# Altium PCB msr50.PcbDoc (part 3 of 8)
Units mil, origin at the board's own origin, x right, y up, seen from the top; angles counter-clockwise.
Board outline 3925 x 3925 mil, 2 copper layers (TopLayer, BottomLayer); 109 components, 122 nets, 846 pads, 52 vias.
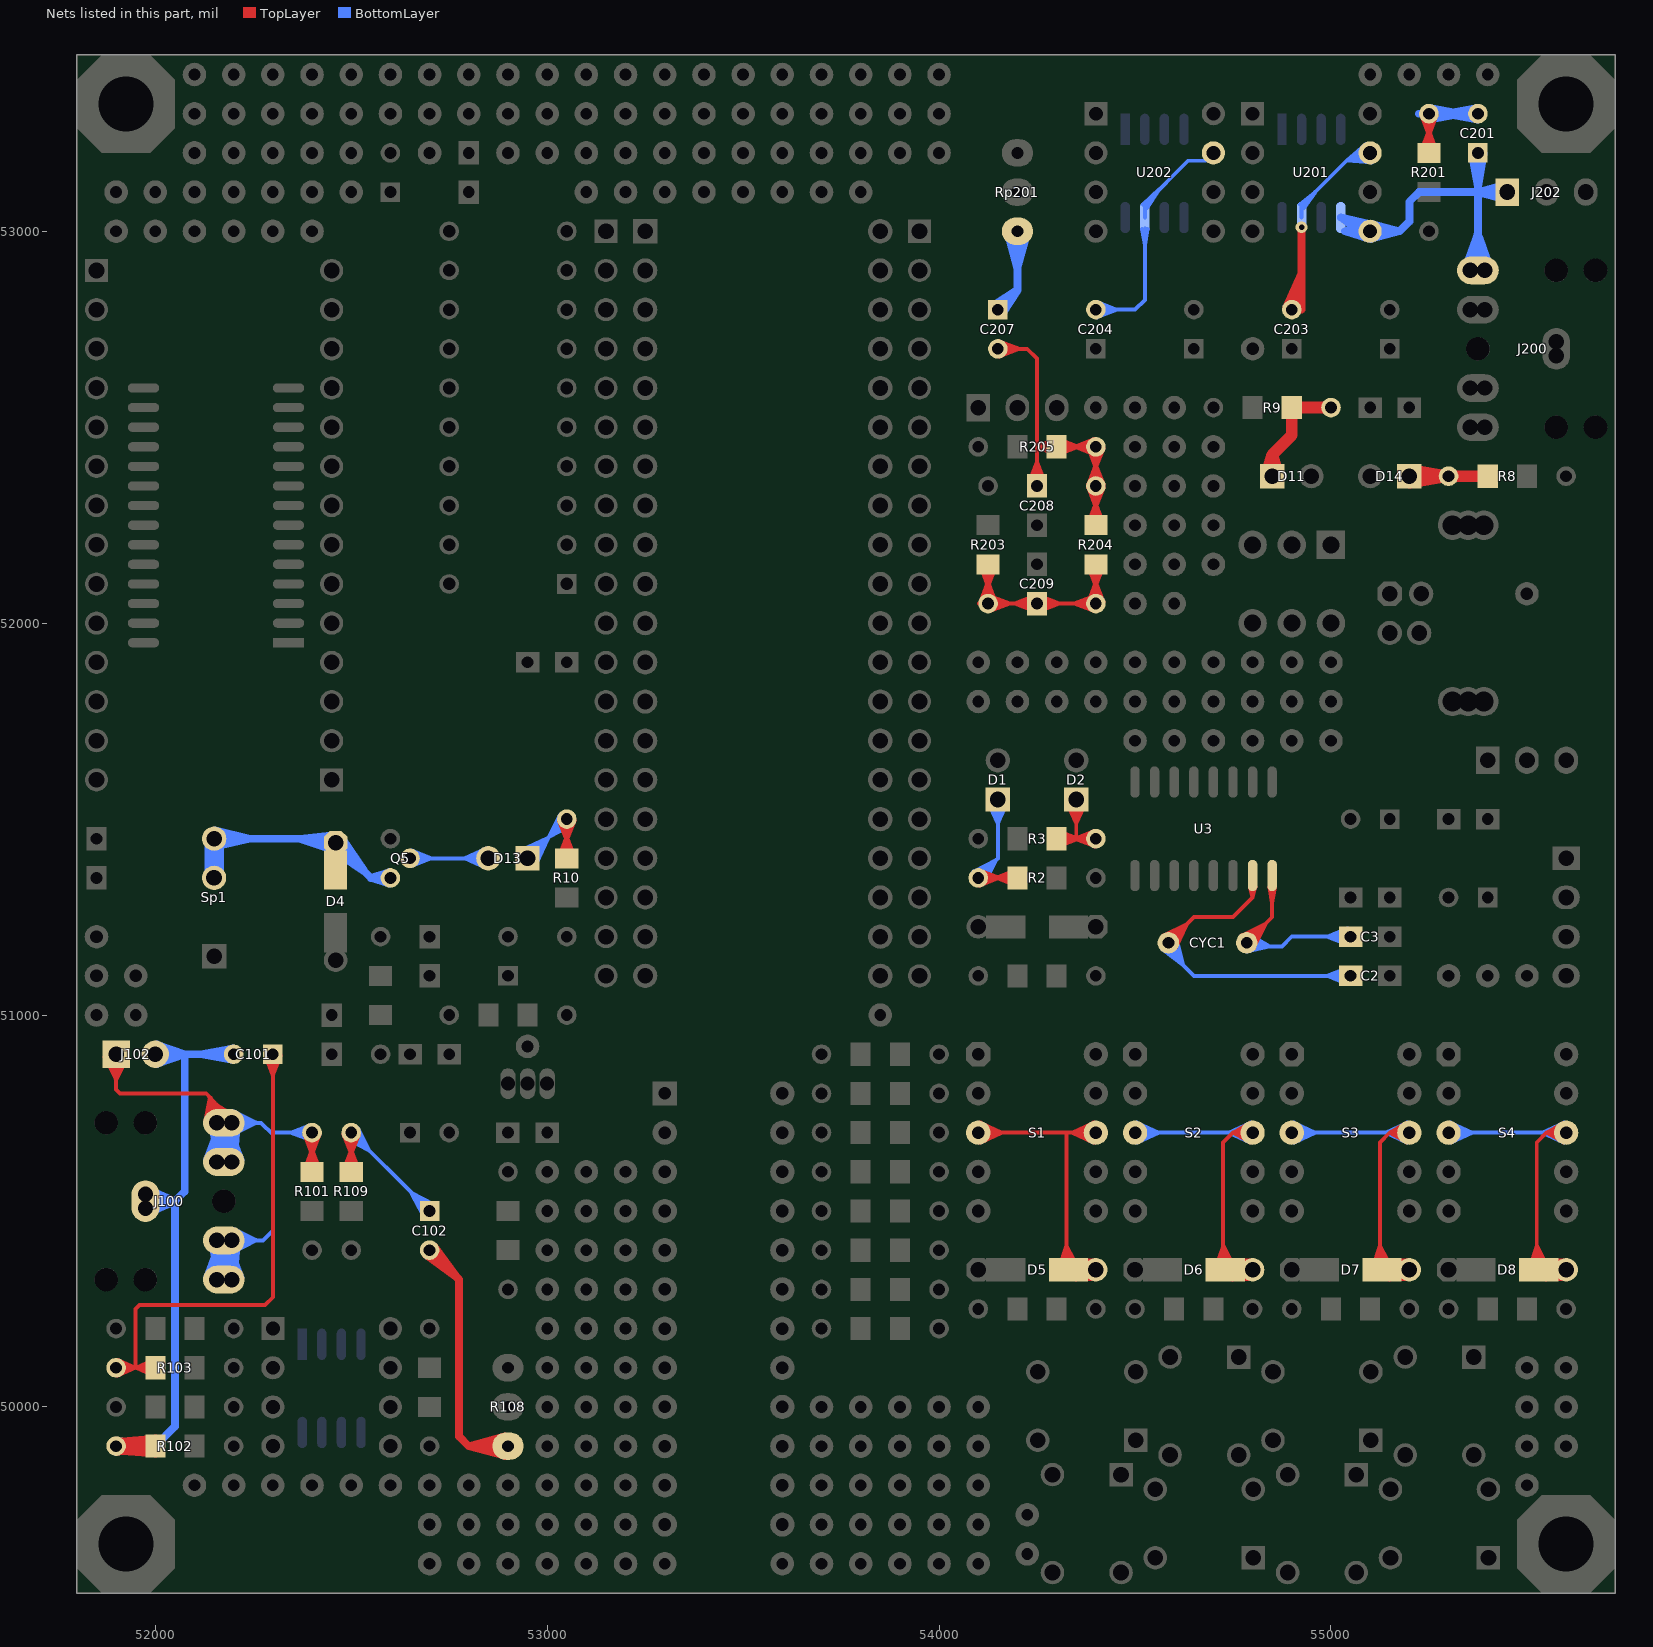
[diagram p3: the nets of this part, all layers, seen from the top]

## Via types
v1: diameter 30, hole 14, TopLayer to BottomLayer, 40 vias
v2: diameter 50, hole 28, TopLayer to BottomLayer, 12 vias

## Nets (pads, with @x,y where several pads share a name; then routed paths per layer and width w, separated by ;. In a path a pad name is that pad's centre, name@x,y a point inside that pad or via, vN(x,y) a via of type N, cw(c..) or ccw(c..) an arc to the next point about the centre after c; other vN are vias at no path point) (continued)
NetC2_1: C2.1 CYC1.2 U3.7 | length 1881
  TopLayer w10: CYC1.2@54571.95,51202.6 54633.56,51233.18 ; CYC1.2@54575.45,51175.07 54650.38,51250 54750,51250 54800,51300 ; CYC1.2@54577.08,51193.93 54633.56,51233.18 ; CYC1.2@54585.11,51184.35 54633.56,51233.18 ; CYC1.2@54594.75,51176.39 54633.56,51233.18 ; CYC1.2@54603.46,51171.33 54633.56,51233.18 ; U3.7@54793.05,51327.12 54800,51300 ; U3.7@54800,51328 54800,51300 ; U3.7@54800,51356 54800,51300 ; U3.7@54806.95,51327.12 54800,51300
  BottomLayer w10: CYC1.2@54568.69,51168.97 54622.08,51128.44 ; CYC1.2@54575.37,51176.52 54622.08,51128.44 ; CYC1.2@54575.45,51175.07 54650.52,51100 C2.1@55050,51100 ; CYC1.2@54585.11,51184.35 54622.08,51128.44 ; CYC1.2@54596.14,51190.24 54622.08,51128.44 ; CYC1.2@54605.7,51193.44 54622.08,51128.44 ; C2.1@55042.06,51079.37 54990,51100 ; C2.1@55042.06,51120.63 54990,51100 ; C2.1@55044.92,51089.05 54990,51100 ; C2.1@55044.92,51110.95 54990,51100 ; C2.1@55046,51100 54990,51100
NetC3_1: C3.1 CYC1.1 U3.8 | length 1540.5
  TopLayer w10: CYC1.1@54771.95,51202.6 54833.56,51233.18 ; CYC1.1@54775.45,51175.07 54850,51249.62 U3.8@54850,51356 ; CYC1.1@54777.08,51193.93 54833.56,51233.18 ; CYC1.1@54785.11,51184.35 54833.56,51233.18 ; CYC1.1@54794.75,51176.39 54833.56,51233.18 ; CYC1.1@54803.46,51171.33 54833.56,51233.18 ; U3.8@54843.02,51327.42 54850,51286 ; U3.8@54850,51328 54850,51286 ; U3.8@54856.98,51327.42 54850,51286
  BottomLayer w10: CYC1.1@54775.45,51175.07 54875.07,51175.07 54900,51200 C3.1@55050,51200 ; CYC1.1@54784.46,51171.87 54843.17,51175.07 ; CYC1.1@54785.11,51184.35 54843.17,51175.07 ; CYC1.1@54785.88,51161.87 54843.17,51175.07 ; CYC1.1@54788.39,51196.42 54843.17,51175.07 ; CYC1.1@54792.85,51205.48 54843.17,51175.07 ; C3.1@55042.06,51179.37 54990,51200 ; C3.1@55042.06,51220.63 54990,51200 ; C3.1@55044.92,51189.05 54990,51200 ; C3.1@55044.92,51210.95 54990,51200 ; C3.1@55046,51200 54990,51200
NetC101_1: C101.1 R103.2 R103.4 | length 1902.4
  TopLayer w10: R103.2@51900,50100 51950,50100 ; R103.2@51901,50090.05 51950,50100 ; R103.2@51901,50109.95 51950,50100 ; R103.2@51904,50080.4 51950,50100 ; R103.2@51904,50119.6 51950,50100 ; R103.4@51995.76,50079.85 51950,50100 ; R103.4@51995.76,50120.15 51950,50100 ; R103.4@51998.88,50089.47 51950,50100 ; R103.4@51998.88,50110.53 51950,50100 ; C101.1@52280.33,50896.36 52300,50845 ; C101.1@52290.04,50899.09 52300,50845 ; C101.1@52300,50900 52300,50280 52280,50260 51960,50260 51950,50250 51950,50100 ; C101.1@52309.96,50899.09 52300,50845 ; C101.1@52319.67,50896.36 52300,50845 ; 51950,50100 R103.4@52000,50100 51950,50100
NetC101_2: C101.2 J100.1 J100.1A J100.1B J102.2 R102.1 R102.3 | length 4388
  TopLayer w20: R102.1@51900,49900 R102.3@52000,49900 ; R102.1@51901.32,49885.06 51985,49900 R102.1@51901.32,49914.94 ; R102.3@51997.03,49888.63 R102.1@51914.83,49912.53 ; R102.3@51997.03,49911.37 R102.1@51914.83,49887.47 ; R102.3@51998.58,49884.47 51914.41,49900 R102.3@51998.58,49915.53 ; R102.3@52000,49896.06 R102.1@51914.83,49887.47 ; R102.3@52000,49903.94 R102.1@51914.83,49912.53 ; R102.3@52000.15,49880.47 R102.1@51914.83,49887.47 ; R102.3@52000.15,49919.53 R102.1@51914.83,49912.53
  BottomLayer w20: R102.1@51900,49900 52000,49900 52050,49950 52050,50525 ; R102.1@51901.32,49885.06 51985,49900 R102.1@51901.32,49914.94 ; J100.1@51975,50525 52050,50525 ; J100.1@51979.31,50499.94 52050,50525 ; J100.1@51979.31,50550.06 52050,50525 ; J102.2@52000,50900 52075,50900 ; J102.2@52004.17,50875.35 52075,50900 ; J102.2@52004.17,50924.65 52075,50900 ; C101.2@52198.68,50885.06 52115,50900 C101.2@52198.68,50914.94 ; C101.2@52200,50900 52075,50900 ; J100.1@51973.05,50529.23 52050,50525 ; J100.1@51973.05,50529.23 52050,50525 ; J100.1@51973.05,50529.23 52050,50525 ; J100.1@51973.05,50529.23 52050,50525 ; J100.1B@51975,50542.72 52050,50525 ; J100.1B@51975,50542.72 52050,50525 ; J100.1B@51975,50542.72 52050,50525 ; J100.1B@51975,50542.72 52050,50525 ; J100.1@51979.29,50555.65 52050,50525 ; J100.1@51979.29,50555.65 52050,50525 ; J100.1@51979.29,50555.65 52050,50525 ; J100.1@51979.29,50555.65 52050,50525 ; 52050,50525 J100.1A@51975,50507.28 52050,50525 ; 52050,50525 51979.29,50494.36 52050,50525 ; 52050,50525 51973.05,50520.77 52050,50525 ; 52050,50525 52075,50550 52075,50900
NetC102_1: C102.1 R109.2 R109.4 | length 1499
  TopLayer w10: R109.4@52479.77,50603.81 52500,50655.59 ; R109.2@52480.33,50696.36 52500,50645 ; R109.4@52489.46,50601.01 52500,50655.59 ; R109.2@52490.04,50699.09 52500,50645 ; R109.4@52500,50600 52500,50655.59 ; R109.4@52500,50625 R109.2@52500,50700 52500,50645 ; R109.2@52509.96,50699.09 52500,50645 ; R109.4@52510.54,50601.01 52500,50655.59 ; R109.2@52519.67,50696.36 52500,50645 ; R109.4@52520.23,50603.81 52500,50655.59
  BottomLayer w10: R109.2@52488.19,50683.86 52546.21,50653.79 ; R109.2@52493.49,50692.41 52546.21,50653.79 ; R109.2@52500,50700 52675,50525 C102.1@52700,50500 52653.79,50546.21 ; R109.2@52507.59,50706.51 52546.21,50653.79 ; R109.2@52516.14,50711.81 52546.21,50653.79 ; C102.1@52683.86,50488.19 52653.79,50546.21 ; C102.1@52692.41,50493.49 52653.79,50546.21 ; C102.1@52706.51,50507.59 52653.79,50546.21 ; C102.1@52711.81,50516.14 52653.79,50546.21
NetC102_2: C102.2 R108.1 | length 1497.1
  TopLayer w20: C102.2@52690.26,50388.59 52767.43,50332.57 C102.2@52711.41,50409.74 ; C102.2@52700,50400 52775,50325 52775,50040 52775,50010 52775,49925 52800,49900 ; R108.1@52900,49900 52800,49900 ; 52800,49900 R108.1@52895,49900 ; 52800,49900 52891.71,49924.78 52800,49900 ; 52800,49900 52891.71,49875.22 52800,49900 ; 52800,49900 R108.1@52895,49900 ; 52800,49900 R108.1@52895,49900
NetC201_1: C201.1 R201.2 R201.4 | length 1117.4
  TopLayer w10: R201.4@55229.77,53203.81 55250,53255.59 ; R201.2@55230.33,53296.36 55250,53245 ; R201.4@55239.46,53201.01 55250,53255.59 ; R201.2@55240.04,53299.09 55250,53245 ; R201.4@55250,53200 R201.2@55250,53300 ; R201.2@55259.96,53299.09 55250,53245 ; R201.4@55260.54,53201.01 55250,53255.59 ; R201.2@55269.67,53296.36 55250,53245 ; R201.4@55270.23,53203.81 55250,53255.59
  BottomLayer w20: R201.2@55225,53300 C201.1@55375,53300 ; R201.2@55250,53300 55335,53300 ; R201.2@55251.32,53285.06 55335,53300 ; R201.2@55251.32,53314.94 55335,53300 ; C201.1@55373.68,53285.06 55290,53300 C201.1@55373.68,53314.94
NetC201_2: C201.2 J200.5 J200.5A J200.5B J202.1 U201.5 U201.15 | length 4376.9
  BottomLayer w20: U201.5@55100.69,52999.31 U201.5@55100,53000 ; U201.5@55102.54,52980.64 55175,53000 ; U201.5@55102.54,53019.36 55175,53000 ; J200.5@55341.9,52903.74 55371.62,52983.09 ; J200.5@55341.94,52903.88 55375,52991.33 ; J200.5@55341.98,52904.01 55375,52988.01 ; J200.5@55349.79,52903.39 55375,52995.43 ; C201.2@55360.06,53198.68 55375,53115 ; J200.5@55368.47,52897.99 55375,52988.01 ; J200.5@55368.48,52898.06 55375,52991.33 ; J200.5@55368.53,52898.41 55371.62,52983.09 ; J200.5@55375,52900 55375,52995.43 ; J200.5@55375,52907.28 55375,53100 ; C201.2@55375,53175 55375,53100 ; C201.2@55375,53200 55375,53115 ; J200.5@55379.15,52898.75 55378.16,52983.89 ; J200.5@55379.2,52898.32 55375,52987.12 ; J200.5@55379.29,52897.71 55371.62,52983.09 ; C201.2@55389.94,53198.68 55375,53115 ; J200.5@55400.21,52903.39 55375,52995.43 ; J200.5@55405.61,52904.39 55371.62,52983.09 ; J200.5@55405.82,52903.73 55375,52987.12 ; J200.5@55405.85,52903.62 55375,52989.89 ; J200.5@55405.85,52903.63 55374.91,52990.08 ; J200.5@55405.83,52903.69 55375,52988.01 ; J200.5@55405.91,52903.39 55378.16,52983.89 ; J202.1@55447.33,53080.18 55375,53100 ; J202.1@55447.33,53119.82 55375,53100 ; J202.1@55450,53100 55375,53100 ; U201.15@55025,53035 55097.07,53019.31 55035,53000 ; U201.15@55025,53035 55097.07,52980.69 55035,53000 ; U201.15@55025,53035 U201.5@55100,53000 ; 55035,53000 U201.5@55100,53000 ; U201.5@55100,53000 55175,53000 ; 55175,53000 55200,53025 55200,53075 55225,53100 55375,53100 ; J200.5A@55355,52900 55371.62,52983.09 ; J200.5A@55355,52900 55375,52988.01 ; J200.5A@55355,52900 55375,52991.33 ; 55371.62,52983.09 J200.5B@55392.72,52900 ; 55374.91,52990.08 J200.5B@55392.72,52900 ; 55374.91,52990.08 J200.5@55379.19,52898.36 ; 55375,52987.12 J200.5B@55392.72,52900 ; 55375,52988.01 J200.5B@55392.72,52900 ; 55375,52988.01 J200.5@55379.2,52898.33 ; 55375,52989.89 J200.5B@55392.72,52900 ; 55375,52989.89 J200.5@55379.19,52898.37 ; 55378.16,52983.89 J200.5B@55392.72,52900
NetC203_2: C203.2 U201.7 U201.17 | length 1228.6
  TopLayer w20: C203.2@54885.86,52804.99 54925,52893.32 ; C203.2@54900,52800 54925,52893.32 ; C203.2@54914.75,52797.25 54925,52893.32 ; 54925,52800 v1(54925,53010)
  BottomLayer w10: U201.17@54920.26,53068.15 54959.72,53099.72 ; U201.17@54925,53035 54925,53065 55040,53180 ; U201.17@54925,53063 54959.72,53099.72 ; U201.17@54930.41,53058.55 54959.72,53099.72 ; U201.7@55087.88,53221.32 55040,53180 ; U201.7@55093.85,53213.16 55040,53180 ; U201.7@55102.98,53185.78 55040,53180 ; U201.7@55103.1,53175.67 55040,53180 ; 55040,53180 U201.7@55100,53200 55080,53180 55040,53180
NetC204_2: C204.2 U202.7 U202.17 | length 1098.6
  BottomLayer w10: C204.2@54400,52800 54500,52800 54525,52825 U202.17@54525,53005 ; C204.2@54400.91,52790.04 54455,52800 ; C204.2@54400.91,52809.96 54455,52800 ; C204.2@54403.64,52780.33 54455,52800 ; C204.2@54403.64,52819.67 54455,52800 ; U202.17@54518.02,53006.42 54525,52965 ; U202.17@54519.93,53067.82 54562.21,53107.21 ; U202.17@54525,53007 54525,52965 ; U202.17@54525,53035 54525,53070 54635,53180 54680,53180 U202.7@54700,53200 ; U202.17@54525,53063 54562.21,53107.21 ; U202.17@54530.62,53058.82 54562.21,53107.21 ; U202.17@54531.98,53006.42 54525,52965
NetC207_1: C207.1 Rp201.3 | length 552.1
  BottomLayer w20: C207.1@54140.58,52811.67 54200,52850 ; C207.1@54150,52800 54200,52850 ; C207.1@54161.67,52790.58 54200,52850 ; Rp201.3@54175.22,52996.71 54200,52905 Rp201.3@54224.78,52996.71 ; Rp201.3@54200,53000 54200,52850
NetC207_2: C207.2 C208.1 R204.2 R204.4 R205.1 R205.3 | length 2810.5
  TopLayer w10: C207.2@54150,52700 54225,52700 54250,52675 54250,52450 ; C207.2@54150.91,52690.04 54205,52700 ; C207.2@54150.91,52709.96 54205,52700 ; C207.2@54153.64,52680.33 54205,52700 ; C207.2@54153.64,52719.67 54205,52700 ; C208.1@54229.37,52357.94 54250,52410 ; C208.1@54239.05,52355.08 54250,52410 ; C208.1@54250,52350 54250,52450 ; C208.1@54250,52354 54250,52410 ; C208.1@54260.95,52355.08 54250,52410 ; C208.1@54270.63,52357.94 54250,52410 ; R205.3@54295.76,52429.85 54250,52450 ; R205.3@54295.76,52470.15 54250,52450 ; R205.3@54298.88,52439.47 54250,52450 ; R205.3@54298.88,52460.53 54250,52450 ; R205.3@54301.01,52439.46 54355.59,52450 ; R205.3@54301.01,52460.54 54355.59,52450 ; R205.3@54303.81,52429.77 54355.59,52450 ; R205.3@54303.81,52470.23 54355.59,52450 ; R204.4@54379.77,52253.81 54400,52305.59 ; R204.2@54380.33,52346.36 54400,52295 ; R204.2@54380.33,52353.64 54400,52405 ; R205.1@54380.33,52446.36 54400,52395 ; R204.4@54389.46,52251.01 54400,52305.59 ; R204.2@54390.04,52349.09 54400,52295 ; R204.2@54390.04,52350.91 54400,52405 ; R205.1@54390.04,52449.09 54400,52395 ; R205.1@54396.36,52430.33 54345,52450 ; R205.1@54396.36,52469.67 54345,52450 ; R205.1@54399.09,52440.04 54345,52450 ; R205.1@54399.09,52459.96 54345,52450 ; R204.4@54400,52250 R204.2@54400,52350 R205.1@54400,52450 54250,52450 ; R204.2@54409.96,52349.09 54400,52295 ; R204.2@54409.96,52350.91 54400,52405 ; R205.1@54409.96,52449.09 54400,52395 ; R204.4@54410.54,52251.01 54400,52305.59 ; R204.2@54419.67,52346.36 54400,52295 ; R204.2@54419.67,52353.64 54400,52405 ; R205.1@54419.67,52446.36 54400,52395 ; R204.4@54420.23,52253.81 54400,52305.59
  BottomLayer w10: R204.2@54400,52350 R204.2@54400.46,52350
NetC209_1: C209.1 R203.2 R203.4 R204.1 R204.3 | length 2271.1
  TopLayer w10: R203.2@54101.67,52050 R203.2@54125,52050 ; R203.4@54104.77,52146.19 54125,52094.41 ; R203.2@54105.33,52053.64 54125,52105 ; R203.4@54114.46,52148.99 54125,52094.41 ; R203.2@54115.04,52050.91 54125,52105 ; R203.4@54125,52150 R203.2@54125,52050 ; R203.2@54125.91,52040.04 54180,52050 ; R203.2@54125.91,52059.96 54180,52050 ; R203.2@54128.64,52030.33 54180,52050 ; R203.2@54128.64,52069.67 54180,52050 ; R203.2@54134.96,52050.91 54125,52105 ; R203.4@54135.54,52148.99 54125,52094.41 ; R203.2@54144.67,52053.64 54125,52105 ; R203.4@54145.23,52146.19 54125,52094.41 ; C209.1@54246.06,52029.37 54194,52050 ; C209.1@54246.06,52070.63 54194,52050 ; C209.1@54248.92,52039.05 54194,52050 ; C209.1@54248.92,52060.95 54194,52050 ; C209.1@54251.08,52039.05 54306,52050 ; C209.1@54251.08,52060.95 54306,52050 ; C209.1@54253.94,52029.37 54306,52050 ; C209.1@54253.94,52070.63 54306,52050 ; R204.3@54379.77,52146.19 54400,52094.41 ; R204.1@54380.33,52053.64 54400,52105 ; R204.3@54389.46,52148.99 54400,52094.41 ; R204.1@54390.04,52050.91 54400,52105 ; R204.1@54396.36,52030.33 54345,52050 ; R204.1@54396.36,52069.67 54345,52050 ; R204.1@54399.09,52040.04 54345,52050 ; R204.1@54399.09,52059.96 54345,52050 ; R204.3@54400,52150 R204.1@54400,52050 C209.1@54250,52050 R203.2@54125,52050 ; R204.1@54409.96,52050.91 54400,52105 ; R204.3@54410.54,52148.99 54400,52094.41 ; R204.1@54419.67,52053.64 54400,52105 ; R204.3@54420.23,52146.19 54400,52094.41
NetD1_2: D1.2 R2.2 R2.4 | length 1390.5
  TopLayer w10: R2.2@54100,51350 R2.4@54200,51350 ; R2.2@54100.91,51340.04 54155,51350 ; R2.2@54100.91,51359.96 54155,51350 ; R2.2@54103.64,51330.33 54155,51350 ; R2.2@54103.64,51369.67 54155,51350 ; R2.4@54196.19,51329.77 54144.41,51350 ; R2.4@54196.19,51370.23 54144.41,51350 ; R2.4@54198.99,51339.46 54144.41,51350 ; R2.4@54198.99,51360.54 54144.41,51350
  BottomLayer w10: R2.2@54088.19,51366.14 54146.21,51396.21 ; R2.2@54093.49,51357.59 54146.21,51396.21 ; R2.2@54100,51350 54150,51400 D1.2@54150,51550 ; R2.2@54107.59,51343.49 54146.21,51396.21 ; R2.2@54116.14,51338.19 54146.21,51396.21 ; D1.2@54124.6,51544.46 54150,51489 ; D1.2@54134.14,51547.9 54150,51489 ; D1.2@54144.01,51549.7 54150,51489 ; D1.2@54155.99,51549.7 54150,51489 ; D1.2@54165.86,51547.9 54150,51489 ; D1.2@54175.4,51544.46 54150,51489
NetD2_2: D2.2 R3.2 R3.4 | length 1008.4
  TopLayer w10: R3.4@54300,51450 R3.2@54400,51450 ; R3.4@54301.01,51439.46 54355.59,51450 ; R3.4@54301.01,51460.54 54355.59,51450 ; R3.4@54303.81,51429.77 54355.59,51450 ; R3.4@54303.81,51470.23 54355.59,51450 ; D2.2@54324.6,51544.46 54350,51489 ; D2.2@54334.14,51547.9 54350,51489 ; D2.2@54344.01,51549.7 54350,51489 ; 54350,51450 D2.2@54350,51550 ; D2.2@54355.99,51549.7 54350,51489 ; D2.2@54365.86,51547.9 54350,51489 ; D2.2@54375.4,51544.46 54350,51489 ; R3.2@54396.36,51430.33 54345,51450 ; R3.2@54396.36,51469.67 54345,51450 ; R3.2@54399.09,51440.04 54345,51450 ; R3.2@54399.09,51459.96 54345,51450
NetD4_1: D4.1 D4.3 Q5.3 Sp1.2 Sp1.3 | length 1648.7
  BottomLayer w20: Sp1.3@52150.33,51450.09 52241.33,51450 ; Sp1.3@52150.42,51450 52450,51450 52550,51350 ; Sp1.3@52152.73,51429.22 52241.33,51450 ; Sp1.3@52152.77,51470.94 52241.33,51450 ; D4.1@52447.39,51424.46 52532.51,51367.49 ; D4.1@52455.77,51420.39 52368.1,51450 ; D4.1@52460.1,51459.92 52368.1,51450 ; D4.1@52475.54,51452.61 52532.51,51367.49 ; Q5.3@52597.75,51335.17 52550,51350 ; Q5.3@52597.75,51364.83 52550,51350 ; Q5.3@52600,51350 52550,51350 ; 52368.1,51450 D4.1@52460.08,51439.92 52532.51,51367.49
  BottomLayer w50: Sp1.3@52150,51449.76 Sp1.2@52150,51350 Sp1.3@52150.33,51450.09
NetD5_2: D5.2 D5.4 S1.3 S1.8 | length 3189.6
  TopLayer w10: S1.3@54100,50700 54325,50700 ; S1.3@54100.3,50694.01 54161,50700 ; S1.3@54100.3,50705.99 54161,50700 ; S1.3@54102.1,50684.14 54161,50700 ; S1.3@54102.1,50715.86 54161,50700 ; S1.3@54105.54,50674.6 54161,50700 ; S1.3@54105.54,50725.4 54161,50700 ; D5.4@54305.65,50352.91 54325,50411.44 ; D5.4@54315.48,50350.54 54325,50411.44 ; D5.4@54330,50350 54325,50411.44 ; D5.4@54344.17,50326.3 D5.2@54393.75,50325.79 ; D5.4@54344.17,50373.7 D5.2@54393.75,50374.21 ; D5.4@54344.24,50352.88 54325,50411.44 ; D5.4@54345.31,50336.42 D5.2@54393.75,50325.79 ; D5.4@54345.31,50363.58 D5.2@54393.75,50374.21 ; D5.4@54348.2,50335.65 D5.2@54397.75,50335.17 ; D5.4@54348.2,50364.35 D5.2@54397.75,50364.83 ; D5.4@54349.15,50325.51 D5.2@54397.75,50335.17 ; D5.4@54349.15,50374.49 D5.2@54397.75,50364.83 ; D5.4@54352.6,50335.63 D5.2@54400,50350 ; D5.4@54352.6,50364.37 D5.2@54400,50350 ; D5.4@54353.56,50356.81 54325,50411.44 ; D5.4@54356.55,50326.24 D5.2@54400,50350 ; D5.4@54356.55,50373.76 D5.2@54400,50350 ; D5.4@54356.81,50336.93 D5.2@54397.75,50364.83 ; D5.4@54356.81,50363.07 D5.2@54397.75,50335.17 ; D5.4@54359.34,50338.5 D5.2@54393.75,50374.21 ; D5.4@54359.34,50361.5 D5.2@54393.75,50325.79 ; D5.4@54363.38,50329.14 D5.2@54397.75,50364.83 ; D5.4@54363.38,50370.86 D5.2@54397.75,50335.17 ; D5.4@54367.37,50332.22 D5.2@54393.75,50374.21 ; D5.4@54367.37,50367.78 D5.2@54393.75,50325.79 ; S1.8@54394.46,50674.6 54339,50700 ; S1.8@54394.46,50725.4 54339,50700 ; S1.8@54397.9,50684.14 54339,50700 ; S1.8@54397.9,50715.86 54339,50700 ; S1.8@54399.7,50694.01 54339,50700 ; S1.8@54399.7,50705.99 54339,50700 ; S1.8@54400,50700 54325,50700 ; 54325,50700 54325,50375 D5.4@54350,50350 ; D5.4@54350,50350 D5.2@54397.75,50364.83 ; D5.4@54350,50350 D5.2@54397.75,50335.17 ; D5.4@54350,50350 D5.2@54393.75,50374.21 ; D5.4@54350,50350 D5.2@54393.75,50325.79 ; D5.4@54350,50350 D5.2@54400,50350 ; D5.4@54350.47,50350 D5.2@54397.75,50364.83 ; D5.4@54350.47,50350 D5.2@54397.75,50335.17 ; D5.4@54350.47,50350 D5.2@54400,50350 ; D5.4@54350.47,50350 D5.2@54393.75,50374.21 ; D5.4@54350.47,50350 D5.2@54393.75,50325.79
NetD6_2: D6.2 D6.4 S2.3 S2.8 | length 3549.8
  TopLayer w10: D6.4@54705.65,50352.92 54725,50411.42 ; D6.4@54715.48,50350.54 54725,50411.42 ; D6.4@54730,50350 54725,50411.42 ; D6.4@54744.17,50326.3 D6.2@54793.75,50325.79 ; D6.4@54744.17,50373.7 D6.2@54793.75,50374.21 ; D6.4@54744.24,50352.88 54725,50411.42 ; D6.4@54745.31,50336.42 D6.2@54793.75,50325.79 ; D6.4@54745.31,50363.58 D6.2@54793.75,50374.21 ; D6.4@54748.2,50335.65 D6.2@54797.75,50335.17 ; D6.4@54748.2,50364.35 D6.2@54797.75,50364.83 ; D6.4@54749.15,50325.51 D6.2@54797.75,50335.17 ; D6.4@54749.15,50374.49 D6.2@54797.75,50364.83 ; D6.4@54752.6,50335.63 D6.2@54800,50350 ; D6.4@54752.6,50364.37 D6.2@54800,50350 ; D6.4@54753.56,50356.82 54725,50411.42 ; D6.4@54756.55,50326.24 D6.2@54800,50350 ; D6.4@54756.55,50373.76 D6.2@54800,50350 ; D6.4@54756.81,50336.93 D6.2@54797.75,50364.83 ; D6.4@54756.81,50363.07 D6.2@54797.75,50335.17 ; D6.4@54759.34,50338.5 D6.2@54793.75,50374.21 ; D6.4@54759.34,50361.5 D6.2@54793.75,50325.79 ; D6.4@54763.38,50329.14 D6.2@54797.75,50364.83 ; D6.4@54763.38,50370.86 D6.2@54797.75,50335.17 ; D6.4@54767.37,50332.22 D6.2@54793.75,50374.21 ; D6.4@54767.37,50367.78 D6.2@54793.75,50325.79 ; S2.8@54793.24,50674.89 54750,50700 ; S2.8@54793.24,50725.11 54750,50700 ; S2.8@54797.44,50684.21 54750,50700 ; S2.8@54797.44,50715.79 54750,50700 ; S2.8@54799.64,50694.01 54750,50700 ; S2.8@54799.64,50705.99 54750,50700 ; S2.8@54800,50700 54750,50700 ; D6.4@54750,50350 D6.2@54797.75,50364.83 ; D6.4@54750,50350 D6.2@54797.75,50335.17 ; D6.4@54750,50350 D6.2@54793.75,50374.21 ; D6.4@54750,50350 D6.2@54793.75,50325.79 ; D6.4@54750,50350 54725,50375 54725,50675 54750,50700 ; D6.4@54750,50350 D6.2@54800,50350 ; D6.4@54750.47,50350 D6.2@54797.75,50364.83 ; D6.4@54750.47,50350 D6.2@54797.75,50335.17 ; D6.4@54750.47,50350 D6.2@54800,50350 ; D6.4@54750.47,50350 D6.2@54793.75,50374.21 ; D6.4@54750.47,50350 D6.2@54793.75,50325.79
  BottomLayer w10: S2.3@54500,50700 S2.8@54800,50700 ; S2.3@54500.3,50694.01 54561,50700 ; S2.3@54500.3,50705.99 54561,50700 ; S2.3@54502.1,50684.14 54561,50700 ; S2.3@54502.1,50715.86 54561,50700 ; S2.3@54505.54,50674.6 54561,50700 ; S2.3@54505.54,50725.4 54561,50700 ; S2.8@54794.46,50674.6 54739,50700 ; S2.8@54794.46,50725.4 54739,50700 ; S2.8@54797.9,50684.14 54739,50700 ; S2.8@54797.9,50715.86 54739,50700 ; S2.8@54799.7,50694.01 54739,50700 ; S2.8@54799.7,50705.99 54739,50700
NetD7_2: D7.2 D7.4 S3.3 S3.8 | length 4581.8
  TopLayer w10: D7.4@55105.65,50352.92 55125,50411.42 ; D7.4@55115.48,50350.54 55125,50411.42 ; D7.4@55130,50350 55125,50411.42 ; D7.4@55144.17,50326.3 D7.2@55193.75,50325.79 ; D7.4@55144.17,50373.7 D7.2@55193.75,50374.21 ; D7.4@55144.24,50352.88 55125,50411.42 ; D7.4@55145.31,50336.42 D7.2@55193.75,50325.79 ; D7.4@55145.31,50363.58 D7.2@55193.75,50374.21 ; D7.4@55148.2,50335.65 D7.2@55197.75,50335.17 ; D7.4@55148.2,50364.35 D7.2@55197.75,50364.83 ; D7.4@55149.15,50325.51 D7.2@55197.75,50335.17 ; D7.4@55149.15,50374.49 D7.2@55197.75,50364.83 ; D7.4@55152.6,50335.63 D7.2@55200,50350 ; D7.4@55152.6,50364.37 D7.2@55200,50350 ; D7.4@55153.56,50356.82 55125,50411.42 ; D7.4@55156.55,50326.24 D7.2@55200,50350 ; D7.4@55156.55,50373.76 D7.2@55200,50350 ; D7.4@55156.81,50336.93 D7.2@55197.75,50364.83 ; D7.4@55156.81,50363.07 D7.2@55197.75,50335.17 ; D7.4@55159.34,50338.5 D7.2@55193.75,50374.21 ; D7.4@55159.34,50361.5 D7.2@55193.75,50325.79 ; D7.4@55163.38,50329.14 D7.2@55197.75,50364.83 ; D7.4@55163.38,50370.86 D7.2@55197.75,50335.17 ; D7.4@55167.37,50332.22 D7.2@55193.75,50374.21 ; D7.4@55167.37,50367.78 D7.2@55193.75,50325.79 ; S3.8@55193.24,50674.89 55150,50700 ; S3.8@55193.24,50725.11 55150,50700 ; S3.8@55197.44,50684.21 55150,50700 ; S3.8@55197.44,50715.79 55150,50700 ; S3.8@55199.64,50694.01 55150,50700 ; S3.8@55199.64,50705.99 55150,50700 ; S3.8@55200,50700 55150,50700 ; D7.4@55150,50350 D7.2@55197.75,50364.83 ; D7.4@55150,50350 D7.2@55197.75,50335.17 ; D7.4@55150,50350 D7.2@55193.75,50374.21 ; D7.4@55150,50350 D7.2@55193.75,50325.79 ; D7.4@55150,50350 D7.2@55200,50350 ; D7.4@55150,50350 55125,50375 55125,50675 55150,50700 ; D7.4@55150.47,50350 D7.2@55197.75,50364.83 ; D7.4@55150.47,50350 D7.2@55197.75,50335.17 ; D7.4@55150.47,50350 D7.2@55200,50350 ; D7.4@55150.47,50350 D7.2@55193.75,50374.21 ; D7.4@55150.47,50350 D7.2@55193.75,50325.79
  BottomLayer w10: 54961,50700 54900.3,50694.01 54961,50700 ; 54961,50700 54900.3,50705.99 54961,50700 ; 54961,50700 54902.1,50684.14 54961,50700 ; 54961,50700 54902.1,50715.86 54961,50700 ; 54961,50700 54905.54,50674.6 54961,50700 ; 54961,50700 54905.54,50725.4 54961,50700 ; 55139,50700 55199.7,50705.99 55139,50700 ; 55139,50700 55199.7,50694.01 55139,50700 ; 55139,50700 55197.9,50715.86 55139,50700 ; 55139,50700 55197.9,50684.14 55139,50700 ; 55139,50700 55194.46,50725.4 55139,50700 ; 55139,50700 55194.46,50674.6 55139,50700 ; S3.3@54900,50700 S3.8@55200,50700 S3.3@54900,50700
NetD8_2: D8.2 D8.4 S4.3 S4.8 | length 3549.8
  TopLayer w10: D8.4@55505.65,50352.92 55525,50411.42 ; D8.4@55515.48,50350.54 55525,50411.42 ; D8.4@55530,50350 55525,50411.42 ; D8.4@55544.17,50326.3 D8.2@55593.75,50325.79 ; D8.4@55544.17,50373.7 D8.2@55593.75,50374.21 ; D8.4@55544.24,50352.88 55525,50411.42 ; D8.4@55545.31,50336.42 D8.2@55593.75,50325.79 ; D8.4@55545.31,50363.58 D8.2@55593.75,50374.21 ; D8.4@55548.2,50335.65 D8.2@55597.75,50335.17 ; D8.4@55548.2,50364.35 D8.2@55597.75,50364.83 ; D8.4@55549.15,50325.51 D8.2@55597.75,50335.17 ; D8.4@55549.15,50374.49 D8.2@55597.75,50364.83 ; D8.4@55552.6,50335.63 D8.2@55600,50350 ; D8.4@55552.6,50364.37 D8.2@55600,50350 ; D8.4@55553.56,50356.82 55525,50411.42 ; D8.4@55556.55,50326.24 D8.2@55600,50350 ; D8.4@55556.55,50373.76 D8.2@55600,50350 ; D8.4@55556.81,50336.93 D8.2@55597.75,50364.83 ; D8.4@55556.81,50363.07 D8.2@55597.75,50335.17 ; D8.4@55559.34,50338.5 D8.2@55593.75,50374.21 ; D8.4@55559.34,50361.5 D8.2@55593.75,50325.79 ; D8.4@55563.38,50329.14 D8.2@55597.75,50364.83 ; D8.4@55563.38,50370.86 D8.2@55597.75,50335.17 ; D8.4@55567.37,50332.22 D8.2@55593.75,50374.21 ; D8.4@55567.37,50367.78 D8.2@55593.75,50325.79 ; S4.8@55593.24,50674.89 55550,50700 ; S4.8@55593.24,50725.11 55550,50700 ; S4.8@55597.44,50684.21 55550,50700 ; S4.8@55597.44,50715.79 55550,50700 ; S4.8@55599.64,50694.01 55550,50700 ; S4.8@55599.64,50705.99 55550,50700 ; S4.8@55600,50700 55550,50700 ; D8.4@55550,50350 D8.2@55597.75,50364.83 ; D8.4@55550,50350 D8.2@55597.75,50335.17 ; D8.4@55550,50350 D8.2@55593.75,50374.21 ; D8.4@55550,50350 D8.2@55593.75,50325.79 ; D8.4@55550,50350 D8.2@55600,50350 ; D8.4@55550,50350 55525,50375 55525,50675 55550,50700 ; D8.4@55550.47,50350 D8.2@55597.75,50364.83 ; D8.4@55550.47,50350 D8.2@55597.75,50335.17 ; D8.4@55550.47,50350 D8.2@55600,50350 ; D8.4@55550.47,50350 D8.2@55593.75,50374.21 ; D8.4@55550.47,50350 D8.2@55593.75,50325.79
  BottomLayer w10: S4.3@55300,50700 S4.8@55600,50700 ; S4.3@55300.3,50694.01 55361,50700 ; S4.3@55300.3,50705.99 55361,50700 ; S4.3@55302.1,50684.14 55361,50700 ; S4.3@55302.1,50715.86 55361,50700 ; S4.3@55305.54,50674.6 55361,50700 ; S4.3@55305.54,50725.4 55361,50700 ; S4.8@55594.46,50674.6 55539,50700 ; S4.8@55594.46,50725.4 55539,50700 ; S4.8@55597.9,50684.14 55539,50700 ; S4.8@55597.9,50715.86 55539,50700 ; S4.8@55599.7,50694.01 55539,50700 ; S4.8@55599.7,50705.99 55539,50700
NetD11_2: D11.2 R9.2 R9.4 | length 471.8
  TopLayer w30: D11.2@54834.17,52377.33 54850,52430 ; D11.2@54850,52375 54850,52430 ; D11.2@54865.83,52377.33 54850,52430 ; R9.4@54900,52546.06 54900,52480 ; R9.2@55000,52550 R9.4@54900,52550 54900,52480 ; 54850,52430 54900,52480
NetD13_1: D13.1 Q5.2 | length 786
  BottomLayer w10: Q5.2@52650,51400 D13.1@52850,51400 ; Q5.2@52650.91,51390.04 52705,51400 ; Q5.2@52650.91,51409.96 52705,51400 ; Q5.2@52653.64,51380.33 52705,51400 ; Q5.2@52653.64,51419.67 52705,51400 ; D13.1@52844.46,51374.6 52789,51400 ; D13.1@52844.46,51425.4 52789,51400 ; D13.1@52847.9,51384.14 52789,51400 ; D13.1@52847.9,51415.86 52789,51400 ; D13.1@52849.7,51394.01 52789,51400 ; D13.1@52849.7,51405.99 52789,51400
NetD13_2: D13.2 R10.2 R10.4 | length 1388.2
  TopLayer w10: R10.4@53029.77,51403.81 53050,51455.59 ; R10.2@53030.33,51496.36 53050,51445 ; R10.4@53039.46,51401.01 53050,51455.59 ; R10.2@53040.04,51499.09 53050,51445 ; R10.4@53050,51400 R10.2@53050,51500 ; R10.2@53059.96,51499.09 53050,51445 ; R10.4@53060.54,51401.01 53050,51455.59 ; R10.2@53069.67,51496.36 53050,51445 ; R10.4@53070.23,51403.81 53050,51455.59
  BottomLayer w10: D13.2@52935.14,51421.33 53002.21,51452.21 ; D13.2@52939.98,51412.47 53002.21,51452.21 ; D13.2@52945.93,51404.41 53002.21,51452.21 ; D13.2@52950,51400 R10.2@53050,51500 ; D13.2@52954.41,51395.93 53002.21,51452.21 ; D13.2@52962.47,51389.98 53002.21,51452.21 ; D13.2@52971.33,51385.14 53002.21,51452.21 ; R10.2@53033.86,51511.81 53003.79,51453.79 ; R10.2@53042.41,51506.51 53003.79,51453.79 ; R10.2@53056.51,51492.41 53003.79,51453.79 ; R10.2@53061.81,51483.86 53003.79,51453.79
NetD14_2: D14.2 R8.2 R8.4 | length 400
  TopLayer w30: D14.2@55200,52375 R8.2@55300,52375 ; D14.2@55201.28,52359.05 R8.2@55300,52375 ; D14.2@55201.28,52390.95 R8.2@55300,52375 ; R8.4@55400,52375 R8.2@55300,52375
NetJ100_2: J100.2 J100.2A J100.2B J100.3 J100.3A J100.3B J100.4 J100.4A J100.4B J100.5 J100.5A J100.5B J102.1 R101.1 R101.3 | length 163603.7
  TopLayer w10: J102.1@51870.81,50893.08 51900,50835 ; J102.1@51880.24,50896.92 51900,50835 ; J102.1@51890.03,50899.23 51900,50835 ; J102.1@51900,50900 51900,50810 51910,50800 52130,50800 52140,50790 ; J102.1@51909.97,50899.23 51900,50835 ; J102.1@51919.76,50896.92 51900,50835 ; J102.1@51929.19,50893.08 51900,50835 ; J100.2@52126.87,50724.04 52140,50790 ; J100.2@52136.97,50722.81 52140,50790 ; J100.2@52138.7,50723.81 52144.22,50783.35 ; J100.2@52138.7,50723.86 52144.61,50779.53 ; J100.2@52138.73,50723.36 52143.29,50777.61 ; J100.2@52138.82,50722.57 52140,50784.98 ; J100.2@52138.81,50722.69 52141.19,50778.63 ; J100.2@52138.85,50722.34 52139.64,50782.13 ; J100.2@52147.02,50723.11 52140,50790 ; J100.2@52148.76,50723.7 52144.61,50779.53 ; J100.2@52148.76,50723.73 52144.22,50783.35 ; J100.2@52148.8,50723.45 52143.29,50777.61 ; J100.2@52148.86,50723.17 52141.19,50778.63 ; J100.2@52148.85,50723.19 52140,50784.98 ; J100.2@52148.88,50723.06 52139.64,50782.13 ; J100.2@52152.69,50743.05 J100.2@52191.03,50743.19 ; J100.2@52152.92,50706.9 J100.2@52186.71,50708.32 ; J100.2@52154.02,50717.02 J100.2@52186.71,50708.32 ; J100.2@52154.07,50733 J100.2@52191.03,50743.19 ; J100.2@52156.32,50716.43 J100.2@52192.64,50716.71 ; J100.2@52156.3,50733.57 J100.2@52194.73,50733.62 ; J100.2@52156.9,50716.39 J100.2@52188.55,50719.28 ; J100.2@52156.97,50716.38 J100.2@52188.3,50719.57 ; J100.2@52157.08,50716.38 J100.2@52188.01,50719.95 ; J100.2@52157.63,50743.62 J100.2@52194.73,50733.62 ; J100.2@52157.82,50706.39 J100.2@52192.64,50716.71 ; J100.2@52159.44,50706.5 J100.2@52188.55,50719.28 ; J100.2@52159.64,50706.53 J100.2@52188.3,50719.57 ; J100.2@52159.85,50733.23 J100.2@52188.01,50719.95 ; J100.2@52159.89,50706.56 J100.2@52188.01,50719.95 ; J100.2@52159.92,50733.21 J100.2@52188.3,50719.57 ; J100.2@52159.97,50733.19 J100.2@52188.55,50719.28 ; J100.2@52160.15,50716.87 J100.2@52194.73,50733.62 ; J100.2@52160.23,50733.1 J100.2@52192.64,50716.71 ; J100.2@52162.2,50717.92 J100.2@52191.03,50743.19 ; J100.2@52162.46,50731.9 J100.2@52186.71,50708.32 ; J100.2@52165.32,50728.13 52139.64,50782.13 ; J100.2@52165.33,50728.11 52141.19,50778.63 ; J100.2@52165.41,50727.87 52143.29,50777.61 ; J100.2@52165.38,50727.95 52140,50784.98 ; J100.2@52165.51,50727.59 52144.61,50779.53 ; J100.2@52165.54,50727.49 52144.22,50783.35 ; J100.2@52165.66,50741.63 J100.2@52188.01,50719.95 ; J100.2@52165.73,50708.4 J100.2@52194.73,50733.62 ; J100.2@52165.77,50741.57 J100.2@52188.3,50719.57 ; J100.2@52165.85,50741.53 J100.2@52188.55,50719.28 ; J100.2@52166.04,50741.43 J100.2@52192.64,50716.71 ; J100.2@52169.84,50711.24 J100.2@52191.03,50743.19 ; J100.2@52170.57,50738.05 J100.2@52186.71,50708.32 ; J100.2@52174,50733.2 52139.64,50782.13 ; J100.2@52173.98,50733.24 52141.19,50778.63 ; J100.2@52174.21,50732.77 52140,50784.98 ; J100.2@52174.2,50732.79 52143.29,50777.61 ; J100.2@52174.47,50732.17 52144.61,50779.53 ; J100.2@52174.6,50731.85 52144.22,50783.35 ; J100.2@52176,50733.19 52140,50790 ; J100.2@52179.06,50715.37 52155.87,50771.77 ; J100.2@52179.66,50714.45 52151.67,50771.59 ; J100.2@52180.16,50713.75 52148.31,50771.15 ; J100.2@52184.16,50739.27 52140,50790 ; J100.2@52200.65,50731.52 52148.31,50771.15 ; J100.2@52200.9,50731.29 52151.67,50771.59 ; J100.2@52201.21,50730.99 52155.87,50771.77 ; J100.2@52206.08,50739.97 52148.31,50771.15 ; J100.2@52206.63,50739.54 52151.67,50771.59 ; J100.2@52207.29,50738.99 52155.87,50771.77 ; R101.3@52379.77,50603.81 52400,50655.59 ; R101.1@52380.33,50696.36 52400,50645 ; R101.3@52389.46,50601.01 52400,50655.59 ; R101.1@52390.04,50699.09 52400,50645 ; R101.3@52400,50600 R101.1@52400,50700 ; R101.1@52409.96,50699.09 52400,50645 ; R101.3@52410.54,50601.01 52400,50655.59 ; R101.1@52419.67,50696.36 52400,50645 ; R101.3@52420.23,50603.81 52400,50655.59 ; J100.2@52138.66,50725.14 52148.31,50771.15 ; J100.2@52138.66,50725.14 52148.31,50771.15 ; J100.2@52138.66,50725.14 52148.31,50771.15 ; J100.2@52138.72,50726.48 52151.67,50771.59 ; J100.2@52138.72,50726.48 52151.67,50771.59 ; J100.2@52138.72,50726.48 52151.67,50771.59 ; 52139.64,50782.13 J100.2B@52157.28,50725 ; 52140,50784.98 J100.2B@52157.28,50725 ; 52140,50790 J100.2B@52157.28,50725 ; 52140,50790 J100.2@52167.13,50728.45 ; 52140,50790 52140,50742.28 J100.2B@52157.28,50725 ; 52141.19,50778.63 J100.2B@52157.28,50725 ; 52144.22,50783.35 J100.2B@52157.28,50725 ; 52144.61,50779.53 J100.2B@52157.28,50725 ; 52148.31,50771.15 J100.2B@52157.28,50725 ; 52148.31,50771.15 J100.2@52165.56,50727.41 ; 52148.31,50771.15 J100.2@52148.7,50724.14 ; 52148.31,50771.15 J100.2@52174.5,50732.1 ; 52148.31,50771.15 J100.2B@52157.28,50725 ; 52148.31,50771.15 J100.2@52165.56,50727.41 ; 52148.31,50771.15 J100.2@52148.7,50724.14 ; 52148.31,50771.15 J100.2@52174.5,50732.1 ; 52148.31,50771.15 J100.2B@52157.28,50725 ; 52148.31,50771.15 J100.2@52165.56,50727.41 ; 52148.31,50771.15 J100.2@52148.7,50724.14 ; 52148.31,50771.15 J100.2@52174.5,50732.1 ; 52148.31,50771.15 J100.2A@52195,50725 ; 52148.31,50771.15 J100.2@52188.55,50719.28 ; J100.2@52148.66,50724.76 52151.67,50771.59 ; J100.2@52148.66,50724.76 52151.67,50771.59 ; J100.2@52148.66,50724.76 52151.67,50771.59 ; 52151.67,50771.59 J100.2B@52157.28,50725 ; 52151.67,50771.59 J100.2@52165.71,50726.81 ; 52151.67,50771.59 J100.2@52174.96,50730.85 ; 52151.67,50771.59 J100.2B@52157.28,50725 ; 52151.67,50771.59 J100.2@52165.71,50726.81 ; 52151.67,50771.59 J100.2@52174.96,50730.85 ; 52151.67,50771.59 J100.2B@52157.28,50725 ; 52151.67,50771.59 J100.2@52165.71,50726.81 ; 52151.67,50771.59 J100.2@52174.96,50730.85 ; 52151.67,50771.59 J100.2A@52195,50725 ; 52151.67,50771.59 J100.2@52188.3,50719.57 ; 52155.87,50771.77 J100.2B@52157.28,50725 ; 52155.87,50771.77 52165.84,50726.05 52155.87,50771.77 ; 52155.87,50771.77 52148.68,50725.54 52155.87,50771.77 ; 52155.87,50771.77 52175.41,50729.25 52155.87,50771.77 ; 52155.87,50771.77 52138.93,50728.15 52155.87,50771.77 ; 52155.87,50771.77 J100.2B@52157.28,50725 ; 52155.87,50771.77 J100.2A@52195,50725 ; 52155.87,50771.77 J100.2@52188.01,50719.95 ; J100.2B@52157.28,50725 J100.2A@52195,50725 ; J100.2B@52157.28,50725 J100.2A@52195,50725 ; J100.2B@52157.28,50725 J100.2@52188.55,50719.28 ; J100.2B@52157.28,50725 J100.2@52188.3,50719.57 ; J100.2B@52157.28,50725 J100.2@52188.01,50719.95 ; J100.2B@52157.28,50725 J100.2@52192.64,50716.71 ; J100.2B@52157.28,50725 J100.2@52186.71,50708.32 ; J100.2B@52157.28,50725 J100.2A@52195,50725 ; J100.2B@52157.28,50725 J100.2@52194.73,50733.62 ; J100.2B@52157.28,50725 J100.2@52191.03,50743.19 ; J100.2@52158.27,50716.43 J100.2A@52195,50725 ; J100.2@52158.27,50716.43 J100.2A@52195,50725 ; J100.2@52158.27,50716.43 J100.2A@52195,50725 ; J100.2@52158.27,50733.57 J100.2A@52195,50725 ; J100.2@52158.27,50733.57 J100.2A@52195,50725 ; J100.2@52158.27,50733.57 J100.2A@52195,50725 ; J100.2@52161.88,50706.95 J100.2A@52195,50725 ; J100.2@52161.88,50706.95 J100.2A@52195,50725 ; J100.2@52161.88,50706.95 J100.2A@52195,50725 ; J100.2@52161.88,50743.05 J100.2A@52195,50725 ; J100.2@52161.88,50743.05 J100.2A@52195,50725 ; J100.2@52161.88,50743.05 J100.2A@52195,50725 ; J100.2@52167.13,50728.45 J100.2A@52195,50725 ; J100.2@52167.13,50728.45 J100.2@52194.73,50733.62 ; J100.2@52167.13,50728.45 J100.2@52192.64,50716.71 ; J100.2@52167.13,50728.45 J100.2@52191.03,50743.19 ; J100.2@52167.13,50728.45 J100.2@52186.71,50708.32